# Altium PCB Proyecto_receptaculo_placa_externa_PCB.PcbDoc (part 2 of 2)
Units mm, origin at the board's own origin, x right, y up, seen from the top; angles counter-clockwise.
Board outline 92.2 x 97.18 mm, 4 copper layers (Top Layer, Sources, Ground, Bottom Layer), stack 0.603 mm thick; 84 components, 60 nets, 307 pads, 76 vias.
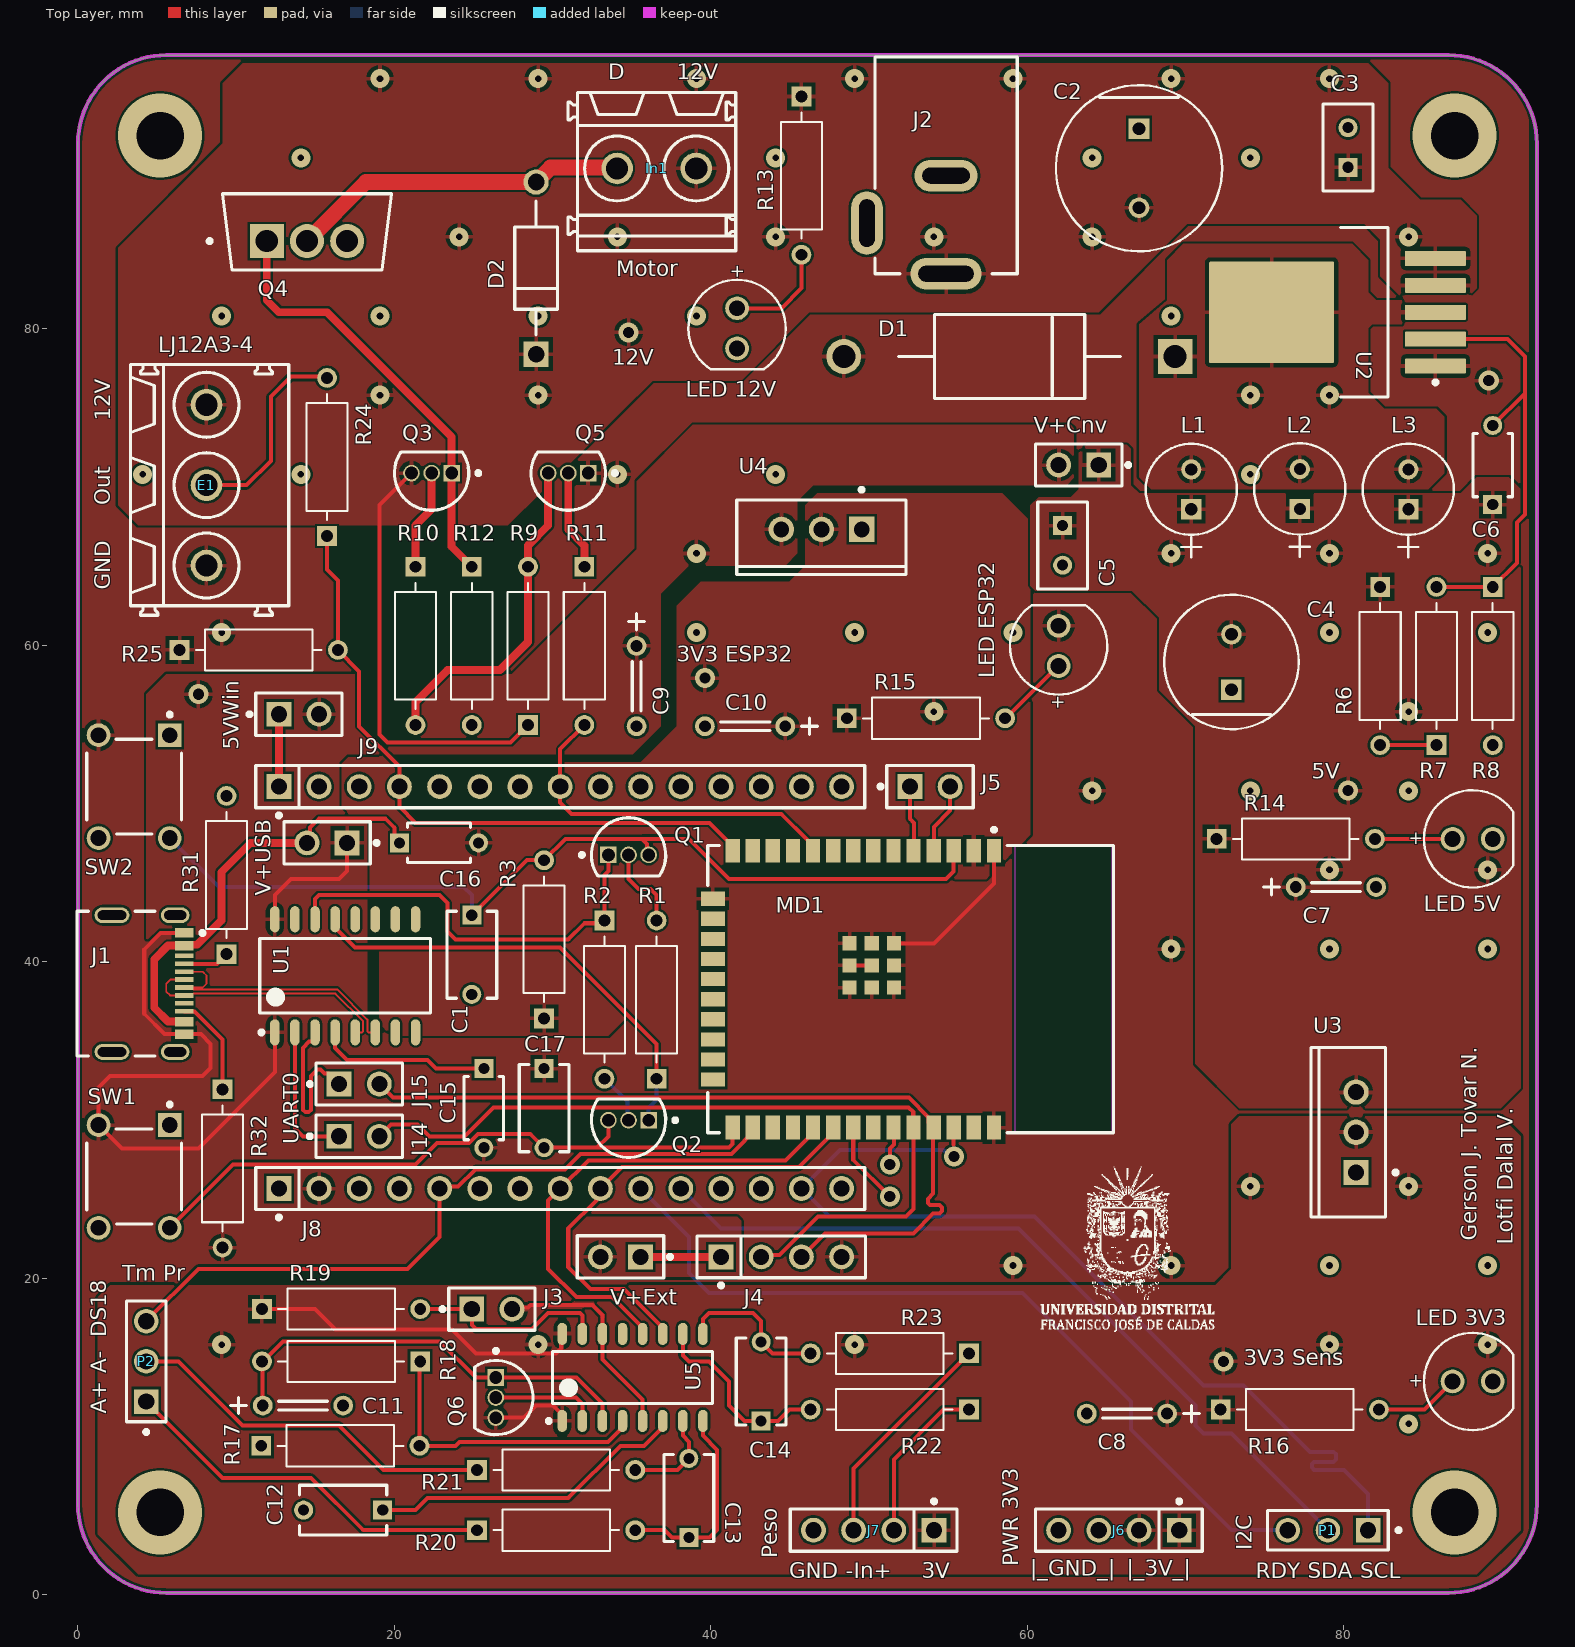
[diagram p0: Top Layer view]

## Via types
v1: diameter 1.2, hole 0.42, Top Layer to Bottom Layer, tented both sides, 63 vias
v2: diameter 1.27, hole 0.711, Top Layer to Bottom Layer, 5 vias
v3: diameter 1.27, hole 0.711, Top Layer to Bottom Layer, tented both sides, 4 vias
v4: diameter 5.3, hole 3, Top Layer to Bottom Layer, 4 vias

## Nets (pads, with @x,y where several pads share a name; then routed paths per layer and width w, separated by ;. In a path a pad name is that pad's centre, name@x,y a point inside that pad or via, vN(x,y) a via of type N, cw(c..) or ccw(c..) an arc to the next point about the centre after c; other vN are vias at no path point) (continued)
NetJ9_8: (continued)
  Top Layer w0.254: R11.2 30.48,53.42 J9.8 J9.8 30.481,50.037 31.183,49.335 44.448,49.335 46.135,47.649 46.135,47.327 MD1.10
"NetLED 3V3_1": "LED 3V3.1" R16.2 | length 5.4
  Top Layer w0.254: R16.2 85.09,11.684 86.868,13.462
"NetLED 5V_1": "LED 5V.1" R14.2 | length 4.9
  Top Layer w0.254: R14.2 86.868,47.752
"NetLED 12V_1": "LED 12V.1" R13.2 | length 6.7
  Top Layer w0.254: 41.656,81.28 44.45,81.28 45.72,82.55 R13.2
"NetLED ESP32_1": "LED ESP32.1" R15.2 | length 4.7
  Top Layer w0.254: R15.2 58.634,55.372 61.936,58.674 61.976,58.674
NetQ1_2: Q1.2 R1.2 | length 5.3
  Top Layer w0.254: Q1.2 34.798,45.212 35.433,44.577 36.195,44.577 36.576,44.196 R1.2
NetQ2_2: Q2.2 R2.2 | length 3.3
  Bottom Layer w0.254: R2.2 34.718,31.148 34.718,30.052 Q2.2
NetQ3_1: Q3.1 Q4.1 R12.1 | length 27.7
  Top Layer w0.5: Q4.1 11.938,81.788 12.7,81.026 15.748,81.026 23.622,73.152 Q3.1 23.622,66.214 R12.1
NetQ3_2: Q3.2 R10.1 | length 6.3
  Top Layer w0.5: R10.1 21.336,67.564 22.352,68.58 Q3.2
NetQ5_2: Q5.2 R11.1 | length 6.3
  Top Layer w0.5: Q5.2 30.988,67.31 32.004,66.294 R11.1
NetQ5_3: Q5.3 R9.2 R10.2 | length 21.3
  Top Layer w0.5: R10.2 21.336,56.388 23.368,58.42 26.67,58.42 28.448,60.198 R9.2 28.448,66.294 29.718,67.564 Q5.3
NetR6_2: R6.2 R7.1 | length 3.6
  Top Layer w0.254: R6.2 R7.1
RATE: J3.1 R19.2 U5.15 | length 13
  Top Layer w0.254: R19.2 J3.1 24.892,17.018 25.146,16.764 28.702,16.764 29.718,17.78 31.728,17.78 31.877,17.631 U5.15
RTS: Q1.1 R2.1 U1.14 | length 26.6
  Top Layer w0.254: U1.14 14.986,43.942 15.24,44.196 22.86,44.196 23.368,43.688 23.368,41.91 23.876,41.402 30.988,41.402 32.004,42.418 33.1,42.418 R2.1 33.274,45.466 33.528,45.72 Q1.1
RXD: J15.1 U1.3 | length 10.4
  Top Layer w0.254: U1.3 14.986,35.091 14.826,34.931 14.611,34.931 14.224,34.544 14.224,30.629 14.373,30.48 14.583,30.48 14.732,30.629 14.732,32.766 15.135,33.169 15.345,33.169 15.598,32.916 15.852,32.916 J15.1
RXDO: J4.2 J14.2 MD1.34 | length 52.3
  Top Layer w0.254: J14.2 19.794,29.7 21.447,29.7 22.209,28.938 24.422,28.938 26.257,30.774 52.502,30.774 52.79,30.486 52.79,29.522 MD1.34 52.808,24.36 52.324,23.876 46.758,23.876 44.346,21.464 43.308,21.464 J4.2
TXD: J14.1 U1.2 | length 9.1
  Top Layer w0.254: U1.2 13.716,29.464 14.224,28.956 J14.1
TXD0: J4.3 J15.2 MD1.35 | length 52.6
  Top Layer w0.254: J15.2 19.916,31.392 52.512,31.392 53.755,30.149 53.755,29.827 MD1.35 54.044,29.47 54.044,25.342 53.709,25.007 53.709,24.753 53.858,24.604 54.461,24.604 54.61,24.456 54.61,24.221 54.461,24.072 54.044,24.072 52.798,22.826 47.21,22.826 J4.3
VBG: C12.1 U5.6 | length 20.3
  Top Layer w0.254: C12.1 21.336,5.334 22.098,6.096 30.988,6.096 34.29,9.398 35.789,9.398 36.957,10.566 U5.6
VCC_USB: C16.1 J1.A4-B9 J1.B4-A9 V+USB.2 | length 27.7
  Top Layer w0.254: V+USB.2@14.682,47.702 14.682,48.464 15.24,49.022 19.446,49.022 20.015,48.453 C16.1@20.015,47.803
  Top Layer w0.5: J1.B4-A9 5.702,36.208 4.826,37.084 4.826,40.132 5.702,41.008 J1.A4-B9 6.777,41.058 7.53,41.058 9.065,42.593 9.065,45.641 10.922,47.498 V+USB.2 V+USB.2@14.682,47.702 ; C16.1@20.015,47.803 C16.1
VFB: R17.2 R18.1 U5.4 | length 19.1
  Top Layer w0.254: R18.1 21.59,14.69 R17.2 23.876,9.398 24.13,9.652 33.503,9.652 34.417,10.566 U5.4
pads on no net: J1.1 J1.2 J1.3 J1.4 J1.A8 J1.B8 J8.1 J8.3 J8.4 J8.6 J8.7 J8.12 J8.13 J8.15 J9.3 J9.5 J9.6 J9.7 J9.9 J9.10 J9.11 J9.12 J9.13 J9.14 J9.15 MD1.6 MD1.7 MD1.8 MD1.9 MD1.11 MD1.12 MD1.13 MD1.16 MD1.17 MD1.18 MD1.19 MD1.20 MD1.21 MD1.22 MD1.23 MD1.24 MD1.27 MD1.28 MD1.32 MD1.37 SW1.1 SW1.4 SW2.1 SW2.4 U1.7 U1.8 U1.9 U1.10 U1.11 U1.12 U1.15 U5.13
copper on no net:
  other v4: 5.2,5.19 87,5.19 5.2,92.19 87,92.19

## Polygon pours and split planes (outlines as drawn)
+12_Vin on Sources "+12_VIN_L02_P004" (solid, pour order 4): 9.144,95.504 10.414,96.774 81.534,96.774 82.804,95.504 82.804,90.17 84.836,88.138 87.376,88.138 88.392,87.122 88.392,82.55 87.884,82.042 83.566,82.042 82.296,83.312 82.296,85.598 81.28,86.614 70.104,86.614 64.516,81.026 46.228,81.026 41.91,76.708 36.322,76.708 34.29,74.676 27.178,67.564 4.064,67.564 2.54,69.088 2.54,85.09 9.144,91.694
NetD1_1 on Sources "NETD1_1_L02_P006" (solid, pour order 6): 67.056,80.264 67.056,70.612 67.818,69.85 85.344,69.85 86.36,70.866 86.36,74.422 85.852,74.93 82.55,74.93 81.534,75.946 81.534,80.01 81.788,80.264 87.63,80.264 87.884,80.518 87.884,81.534 87.63,81.788 82.042,81.788 81.534,82.296 81.534,84.328 80.518,85.344 69.85,85.344 68.834,84.328 68.834,81.788
5V_DC-DC on Sources "5V_DC-DC_L02_P007" (solid, pour order 7): 63.754,72.644 66.294,72.644 66.548,72.39 66.548,70.104 67.056,69.596 87.376,69.596 88.392,70.612 90.424,70.612 91.186,69.85 91.186,32.004 89.916,30.734 73.406,30.734 70.612,33.528 70.612,54.864 68.326,57.15 68.326,61.722 66.604,63.444 60.508,63.444 60.198,63.754 60.198,68.834 60.706,69.342 62.738,69.342 63.246,69.85 63.246,72.136
3V3_LDO_Sens on Sources "3V3_LDO_SENS_L02_P008" (solid, pour order 8): 73.406,30.226 89.916,30.226 91.186,28.956 91.186,4.064 88.392,1.27 3.81,1.27 1.27,3.81 1.27,18.796 2.032,19.558 71.882,19.558 72.898,20.574 72.898,29.718
5V_Winner on Sources "5V_WINNER_L02_P009" (solid, pour order 9): 62.738,73.914 62.944,73.708 62.944,70.564 62.484,70.104 46.482,70.104 45.466,69.088 45.466,65.786 44.704,65.024 38.608,65.024 36.83,63.246 36.83,54.864 35.052,53.086 17.018,53.086 16.51,52.578 16.51,49.784 17.272,49.022 18.034,49.022 18.288,48.768 18.288,24.892 19.304,23.876 41.656,23.876 41.91,23.622 41.91,20.32 41.656,20.066 4.826,20.066 4.318,20.574 4.318,56.896 5.588,58.166 27.432,58.166 35.306,66.04 35.306,70.358 38.862,73.914 42.418,73.914
3V3_LDO_EPS32 on Sources "3V3_LDO_EPS32_L02_P022" (solid, pour order 22): 58.42,69.596 60.198,67.818 60.198,48.006 57.404,45.212 36.068,45.212 34.798,43.942 34.798,36.576 33.528,35.306 19.812,35.306 19.05,36.068 19.05,48.26 23.368,52.578 35.56,52.578 37.846,54.864 37.846,62.484 39.37,64.008 44.958,64.008 45.974,65.024 45.974,68.834 46.736,69.596
+12_Vin on Top Layer "+12_VIN_L01_P003" (solid, remove dead copper, pour order 3): 9.144,95.504 10.414,96.774 81.534,96.774 82.804,95.504 82.804,90.17 84.836,88.138 87.376,88.138 88.392,87.122 88.392,82.55 87.884,82.042 83.566,82.042 82.296,83.312 82.296,85.598 81.28,86.614 70.104,86.614 64.516,81.026 46.228,81.026 41.91,76.708 36.322,76.708 34.29,74.676 27.178,67.564 3.81,67.564 2.54,68.834 2.54,85.09 9.144,91.694
GND on Top Layer "GND_L01_P028" (solid, remove dead copper, pour order 28): 88.9,97.282 91.694,94.488 91.694,2.794 89.002,0.102 3.2,0.102 0.004,3.298 0.004,93.984 3.302,97.282
NetD1_1 on Top Layer "NETD1_1_L01_P000" (solid, remove dead copper, pour order 0): 67.056,80.264 67.056,70.612 67.818,69.85 85.344,69.85 86.36,70.866 86.36,74.422 85.852,74.93 82.55,74.93 81.534,75.946 81.534,80.01 81.788,80.264 87.63,80.264 87.884,80.518 87.884,81.534 87.63,81.788 82.042,81.788 81.534,82.296 81.534,84.328 80.518,85.344 69.85,85.344 68.834,84.328 68.834,81.788
3V3_LDO_Sens on Top Layer "3V3_LDO_SENS_L01_P011" (solid, remove dead copper, pour order 11): 73.406,30.226 89.916,30.226 91.186,28.956 91.186,4.064 88.392,1.27 3.81,1.27 1.27,3.81 1.27,18.796 2.032,19.558 71.882,19.558 72.898,20.574 72.898,29.718
5V_DC-DC on Top Layer "5V_DC-DC_L01_P012" (solid, remove dead copper, pour order 12): 63.754,72.644 66.294,72.644 66.548,72.39 66.548,70.104 67.056,69.596 87.376,69.596 88.392,70.612 90.424,70.612 91.186,69.85 91.186,32.004 89.916,30.734 73.406,30.734 70.612,33.528 70.612,54.864 68.326,57.15 68.326,61.722 66.604,63.444 60.508,63.444 60.198,63.754 60.198,68.834 60.706,69.342 62.738,69.342 63.246,69.85 63.246,72.136
5V_Winner on Top Layer "5V_WINNER_L01_P023" (solid, remove dead copper, pour order 23): 62.738,73.914 62.944,73.708 62.944,70.564 62.484,70.104 46.482,70.104 45.466,69.088 45.466,65.786 44.704,65.024 38.608,65.024 36.83,63.246 36.83,54.864 35.052,53.086 17.018,53.086 16.51,52.578 16.51,49.784 17.272,49.022 18.034,49.022 18.288,48.768 18.288,24.892 19.304,23.876 41.656,23.876 41.91,23.622 41.91,20.32 41.656,20.066 4.826,20.066 4.318,20.574 4.318,56.896 5.588,58.166 27.432,58.166 35.306,66.04 35.306,70.358 38.862,73.914 42.418,73.914
3V3_LDO_EPS32 on Top Layer "3V3_LDO_EPS32_L01_P024" (solid, remove dead copper, pour order 24): 58.42,69.596 60.198,67.818 60.198,48.006 57.404,45.212 36.068,45.212 34.798,43.942 34.798,36.576 33.528,35.306 19.812,35.306 19.05,36.068 19.05,48.26 23.368,52.578 35.56,52.578 37.846,54.864 37.846,62.484 39.37,64.008 44.958,64.008 45.974,65.024 45.974,68.834 46.736,69.596
GND on Top Layer "GND_L01_P005" (solid, pour order 5): 89.916,78.232 90.424,77.724 90.424,75.946 89.916,75.438 83.312,75.438 82.55,76.2 82.55,77.724 83.058,78.232
GND on Ground "GND_L03_P027" (solid, remove dead copper, pour order 27): 88.9,97.282 91.694,94.488 91.694,2.794 89.002,0.102 3.2,0.102 0.004,3.298 0.004,93.984 3.302,97.282
GND on Bottom Layer "GND_L04_P026" (solid, remove dead copper, pour order 26): 88.9,97.282 91.694,94.488 91.694,2.794 89.002,0.102 3.2,0.102 0.004,3.298 0.004,93.984 3.302,97.282

## Keep-outs
Keep-Out Layer:
  the board outline again, w0.254

## Silkscreen, mask and mechanical layers (free items; w line width, h text height)
Top Overlay:
  drawing of 669 lines, arcs and shapes, not listed
  text "D" at 33.528,95.758 h1
  text "12V" at 37.846,95.758 h1
  text "Motor" at 34.036,83.312 h1
  text "LJ12A3-4" at 5.08,78.486 h1
  text "12V" at 33.782,77.724 h1
  text "12V" at 2.032,74.168 h1 r90
  text "Out" at 2.032,68.834 h1 r90
  text "GND" at 2.032,63.5 h1 r90
  text "3V3 ESP32" at 37.846,58.928 h1
  text "5V" at 77.978,51.562 h1
  text "UART0" at 13.97,28.448 h1 r90
  text "Gerson J. Tovar N." at 88.392,22.352 h1 r90
  text "Lotfi Dalal V." at 90.678,22.098 h1 r90
  text "Tm Pr" at 2.794,19.812 h1
  text "DS18" at 1.778,16.256 h1 r90
  text "3V3 Sens" at 73.66,14.478 h1
  text "A-" at 1.778,13.97 h1 r90
  text "A+" at 1.778,11.43 h1 r90
  text "I2C" at 74.168,2.794 h1 r90
  text "Peso" at 44.196,2.286 h1 r90
  text "PWR 3V3" at 59.436,1.778 h1 r90
  text "|_GND_|" at 60.198,1.183 h1
  text "|_3V_|" at 66.294,1.183 h1
  text "GND" at 44.958,1.016 h1
  text "-In+" at 48.514,1.016 h1
  text "3V" at 53.34,1.016 h1
  text "RDY" at 74.422,1.016 h1
  text "SDA" at 77.724,1.016 h1
  text "SCL" at 81.026,1.016 h1
Bottom Overlay:
  drawing of 727 lines, arcs and shapes, not listed
  text "Gerson J. Tovar N." at 42.926,94.234 h2
  text "Lotfi Dalal V." at 42.672,91.44 h2
  text "Proyecto de grado / Modalidad: monografia" at 66.802,82.042 h2
  text "Desarrollo de un receptaculo de bajo costo para el monitoreo de calidad, de manera remota con tecnologia IoT, enfocado en comida de silo para ganaderia bovina." at 86.804,59.436 h2

## Text inside footprints (layer, text, board x,y; h text height)
E1: Top Overlay "A1" at 7.598,80.248 h0 r270
In1: Top Overlay "A1" at 44.151,90.677 h0 r180
L1: Top 3D Body "RefDes2" at 70.993,67.615 h1.27 r90; Top Overlay "RefDes" at 70.993,67.932 h0 r90
L2: Top 3D Body "RefDes2" at 77.851,67.64 h1.27 r90; Top Overlay "RefDes" at 77.851,67.958 h0 r90; Top Overlay "REFDES" at 77.851,67.64 h0 r90
L3: Top 3D Body "RefDes2" at 84.709,67.615 h1.27 r90; Top Overlay "RefDes" at 84.709,67.932 h0 r90; Top Overlay "REFDES" at 84.709,67.615 h0 r90
"LED 3V3": Top Overlay "+" at 84.088,13.132 h0.8
"LED 5V": Top Overlay "+" at 84.088,47.422 h0.8
"LED 12V": Top Overlay "+" at 41.326,84.06 h0.8 r270
"LED ESP32": Top Overlay "+" at 62.306,55.894 h0.8 r90